# EAGLE board PSU (EAGLE 7.6.0)
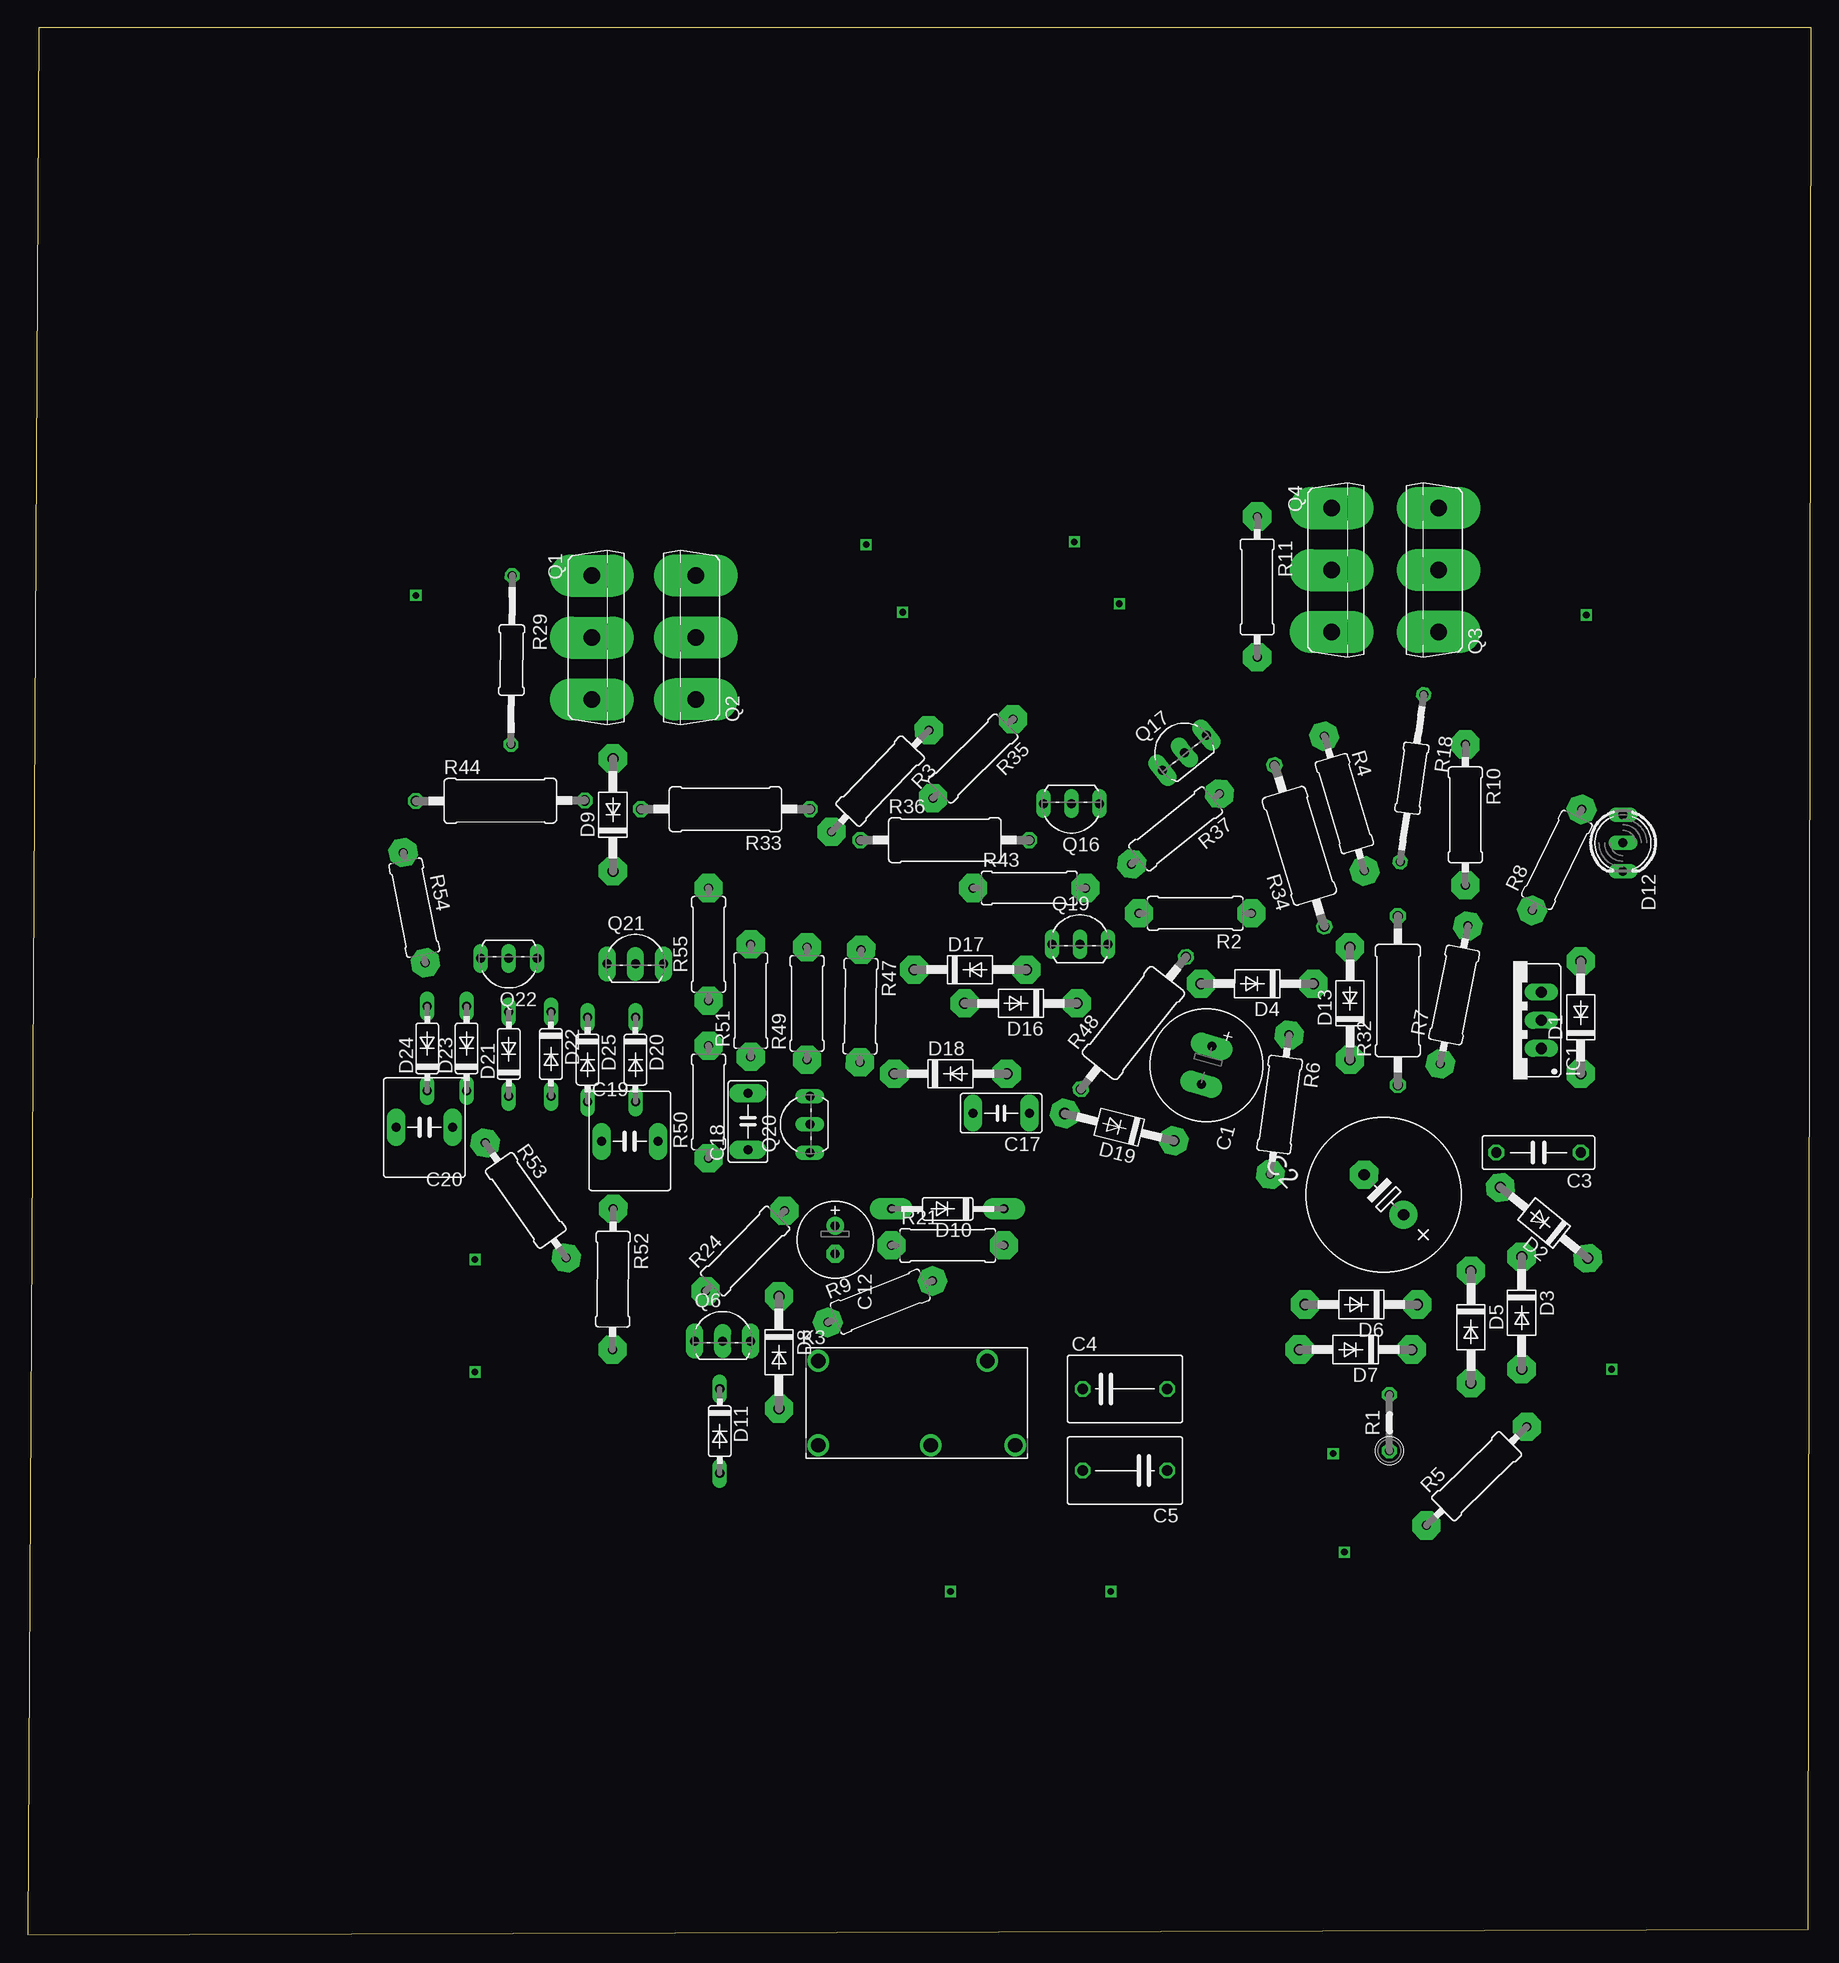
[diagram p0: board, top side]
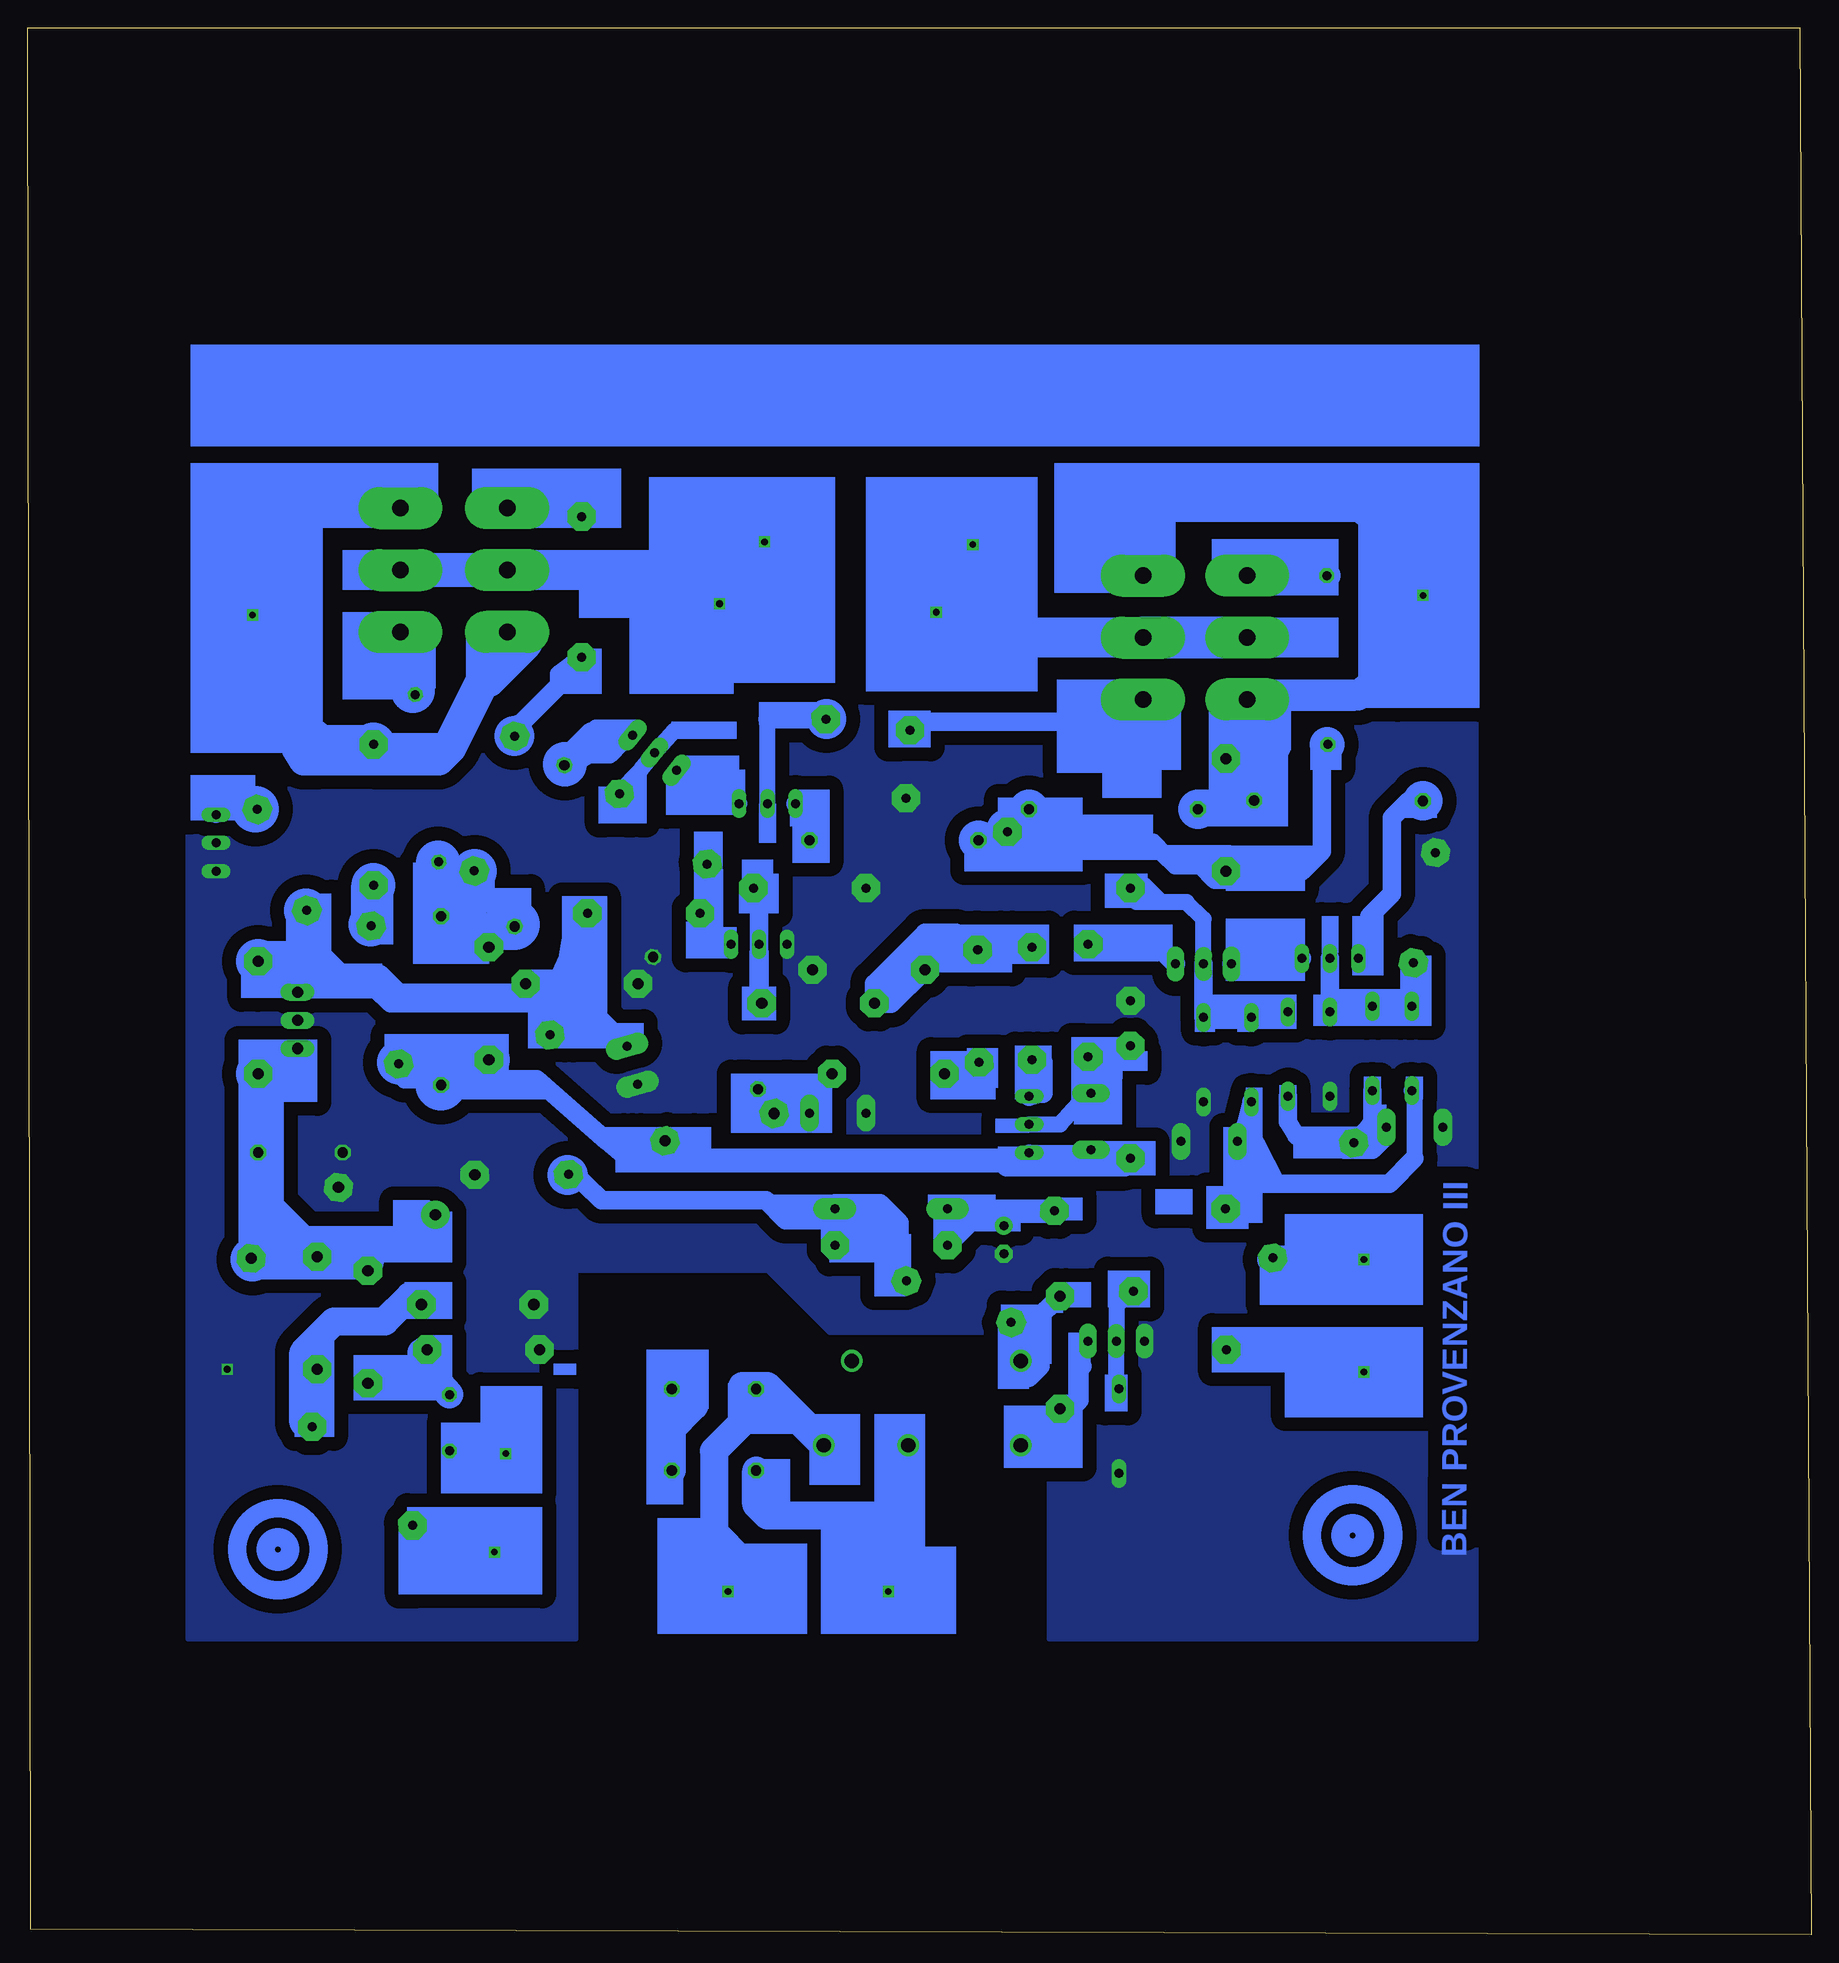
[diagram p1: board, bottom side, seen from below]

Size 161.02 x 172.14 mm. Coordinates in mm from the lower left corner, seen from the top.
Outline: 0,0 160.76,0.51 161.02,172.14 1.02,172.14 0,0
Copper layers (1*16): Top 0.035mm / dielectric 1.5mm / Bottom 0.035mm
Design rules "default": minimum track width 10mil, minimum drill 24mil, track to track 8mil, track to pad 8mil, pad to pad 8mil, via to via 8mil, smd to smd 8mil, copper to edge 40mil, drill to drill 8mil, minimum pad ring 10mil, minimum via ring 8mil, stop-mask expansion 4mil, vias tented up to drill 0mil, thermal gap 10mil

## Footprints (pad centres in the part's own frame; a part is rotated, then mirrored left to right if it is on the bottom)
E3,5-10 = drill 0.813 pad 1.93 long: + -1.778,0; - 1.778,0
E5-13 = drill 1.016 pad 2.54: + -2.54,0 | drill 1.016 pad 2.54 octagon: - 2.54,0
C075-032X103 = drill 0.914 octagon: 1 -3.81,0; 2 3.81,0
C075-063X106 = drill 0.914 octagon: 1 -3.81,0; 2 3.81,0
E2,5-7 = drill 0.813 pad 1.6: + -1.27,0 | drill 0.813 pad 1.6 octagon: - 1.27,0
C050-035X075 = drill 0.813 pad 1.676 long: 1 -2.54,0; 2 2.54,0
C050-075X075 = drill 0.813 pad 1.676 long: 1 -2.54,0; 2 2.54,0
DO41-10 = drill 1 pad 2.54 octagon: A 5.08,0; C -5.08,0
DO35-10 = drill 0.813 pad 1.93 long: A 5.08,0; C -5.08,0
DO35-7 = drill 0.813 long: A 3.81,0; C -3.81,0
DUOLED5MM = drill 0.813 long: AG -2.54,0; AR 2.54,0; K 0,0
78XXS = drill 1.016 long: GND 0,-2.54; IN -2.54,-2.54; OUT 2.54,-2.54
RELAY_ALQ112 = drill 1.3: 1 -8.89,-3.81; 2 -8.89,3.81; 3 1.27,-3.81; 4 6.35,3.81; 5 8.89,-3.81
TO247BV = drill 1.499 pad 3.81 long: D 0,-2.921; G -5.588,-2.921; S 5.588,-2.921
TO92-EBC = drill 0.813 pad 1.524 long: B 0,-1.27 | drill 0.813 pad 1.6 long: C -2.54,-1.27; E 2.54,-1.27
TO92-EBC' = drill 0.813 long: B 0,-1.27; C -2.54,-1.27; E 2.54,-1.27
0207/5V = drill 0.813 octagon: 1 -2.54,0; 2 2.54,0
0309/10 = drill 0.813 pad 2.54 octagon: 1 -5.08,0; 2 5.08,0
0309/12 = drill 0.813 pad 2.54 octagon: 1 -6.35,0; 2 6.35,0
0207/15 = drill 0.813 octagon: 1 -7.62,0; 2 7.62,0
0411/15 = drill 0.914 octagon: 1 -7.62,0; 2 7.62,0

## Placement (x,y rotation side)
C1  100uF  [E3,5-10]  106.43,78.49 254.5 top
C2  560uF  [E5-13]  122.43,66.8 134.5 top
C3  .1uF  [C075-032X103]  136.4,70.61 180 top
C4  10R NTC  [C075-063X106]  99.06,49.28 0 top
C5  10R NTC  [C075-063X106]  99.06,41.91 180 top
C12  22uF  [E2,5-7]  72.9,62.74 270 top
C17  47nF  [C050-035X075]  87.88,74.17 180 top
C18  1uF  [C050-035X075]  65.02,73.41 90 top
C19  10uF  [C050-075X075]  54.36,71.63 0 top
C20  10uF  [C050-075X075]  35.81,72.9 180 top
D1  4007  [DO41-10]  140.21,82.8 90 top
D2  27v  [DO41-10]  136.91,64.26 140.9 top
D3  4007  [DO41-10]  134.87,56.13 270 top
D4  4007  [DO41-10]  111,85.85 179.9 top
D5  4007  [DO41-10]  130.3,54.86 270 top
D6  4007  [DO41-10]  120.4,56.9 180 top
D7  4007  [DO41-10]  119.89,52.83 180 top
D8  4007  [DO41-10]  67.82,52.58 270 top
D9  12v  [DO41-10]  52.83,101.09 90 top
D10  4148  [DO35-10]  83.06,65.53 180 top
D11  15v  [DO35-7]  62.48,45.47 270 top
D12  [DUOLED5MM]  144.02,98.55 270 top
D13  12v  [DO41-10]  119.38,84.07 90 top
D16  4148  [DO41-10]  89.66,84.07 180 top
D17  27v  [DO41-10]  85.09,87.12 0 top
D18  4148  [DO41-10]  83.31,77.72 0 top
D19  68v  [DO41-10]  98.55,72.9 165.9 top
D20  4148  [DO35-7]  54.86,78.99 270 top
D21  4148  [DO35-7]  43.43,79.5 90 top
D22  4148  [DO35-7]  47.24,79.5 270 top
D23  4148  [DO35-7]  39.62,80.01 90 top
D24  4148  [DO35-7]  36.07,80.01 90 top
D25  4148  [DO35-7]  50.55,78.99 270 top
IC1  [78XXS]  134.11,82.55 90 top
K3  ALQ312  [RELAY_ALQ112]  80.26,48.01 0 top
Q1  NMOS V-  [TO247BV]  53.85,117.09 270 top
Q2  NMOS V-  [TO247BV]  57.4,117.09 90 top
Q3  PMOS V+  [TO247BV]  124.46,123.19 90 top
Q4  PMOS V+  [TO247BV]  120.65,123.19 270 top
Q6  ZVN2106  [TO92-EBC]  62.74,54.86 0 top
Q16  MPSA92  [TO92-EBC']  94.23,100.84 180 top
Q17  MPSA42  [TO92-EBC]  103.63,107.7 38.7 top
Q19  BT169D  [TO92-EBC']  95,90.68 0 top
Q20  MPSA92  [TO92-EBC']  69.34,73.15 90 top
Q21  MPSA42  [TO92-EBC]  54.86,88.9 0 top
Q22  MPSA92  [TO92-EBC']  43.43,86.87 180 top
R1  100mA  [0207/5V]  122.94,46.23 90 top
R2  1k74  [0309/10]  105.41,92.2 180 top
R3  22  [0309/12]  76.96,104.14 226.2 top
R4  22  [0309/12]  118.87,102.11 286.7 top
R5  22R  [0309/12]  130.81,41.4 44.5 top
R6  0  [0309/12]  113.03,74.93 262.4 top
R7  0  [0309/12]  128.78,84.84 78.7 top
R8  3k3  [0309/10]  138.05,97.03 63.9 top
R9  0  [0309/10]  76.96,57.15 21.6 top
R10  0  [0309/12]  129.79,101.09 270 top
R11  0  [0309/12]  111,121.67 270 top
R18  22  [0207/15]  124.97,104.39 262 top
R21  100k  [0309/10]  83.06,62.23 0 top
R24  1k  [0309/10]  64.77,61.72 45.4 top
R29  22  [0207/15]  43.69,115.06 269.6 top
R32  33k  [0411/15]  123.7,84.33 90 top
R33  33k  [0411/15]  62.99,101.6 180 top
R34  5k6  [0411/15]  114.81,98.3 107.1 top
R35  2k2  [0309/10]  85.34,106.17 224.6 top
R36  5k6  [0411/15]  82.8,98.81 0 top
R37  2k2  [0309/10]  103.63,99.82 218.7 top
R43  1M  [0309/10]  90.42,94.49 0 top
R44  10k  [0411/15]  42.67,102.36 0.2 top
R47  4k7 2W  [0309/10]  75.18,83.82 269.3 top
R48  1M  [0411/15]  99.82,82.3 51.5 top
R49  4k7 2W  [0309/10]  70.36,84.07 90 top
R50  100k  [0309/10]  61.47,75.18 90 top
R51  25k  [0309/10]  65.28,84.33 90 top
R52  100k HV  [0309/12]  52.83,59.18 269.7 top
R53  100k HV  [0309/12]  44.96,66.29 305.2 top
R54  960k  [0309/10]  34.91,92.71 281.3 top
R55  960k  [0309/10]  61.47,89.41 90 top

## Library data of the parts
C1-C5 C12 C17-C20 R1-R11 R18 R21 R24 R29 R32-R37 R43 R44 R47-R55 = resistor
D1-D11 D13 D16-D25 = diode
D12 = led
IC1 = v-reg
K3 = ALQ112; AVAILABILITY: Unavailable; DESCRIPTION: General Purpose Relay SPDT _1 Form C_ 12VDC Coil Through Hole; MF: Panasonic Electric; MP: ALQ112; PACKAGE: FBGA-484 Panasonic; PRICE: None
Q1-Q4 = transistor-power
Q6 Q17 Q21 = transistor-npn
Q16 Q19 Q20 Q22 = transistor-pnp

## Nets
AGND: C1.- C2.- C3.2 C12.- C17.2 C19.2 C20.2 D2.A D4.A D6.A D7.A D11.A D12.AR D12.K D17.A D20.A D21.C IC1.GND Q6.C Q19.C R35.2 R43.1 R48.2 R54.1 R55.1
N$1: C2.+ C3.1 D1.C D2.C D3.C D5.C IC1.IN
N$2: D3.A D6.C R5.2
N$4: C1.+ D1.A D4.C IC1.OUT R2.1 R6.1 R8.1
N$5: D5.A D7.C R1.2
N$10: C4.1 K3.5
N$11: Q3.G R18.1
N$12: Q1.G R29.1
N$13: R4.1 R11.2
N$14: Q2.G R3.1
N$15: D8.A K3.1 Q6.E
N$16: D10.C R6.2 R9.2 R21.2
N$17: R1.1
N$18: R5.1
N$19: C5.2 K3.3
N$20: D8.C K3.2 R9.1
N$22: R7.2 R10.2
N$24: D12.AG R8.2
N$30: D9.C R3.2 R29.2 R33.1 R36.1
N$36: Q4.G R11.1
N$37: Q3.S Q4.S R10.1
N$39: C4.2 C5.1
N$40: C12.+ D10.A R21.1 R24.2
N$43: D11.C Q6.B R24.1
N$54: Q3.D Q4.D
N$55: D9.A Q1.S Q2.S R33.2 R44.2
N$57: Q1.D Q2.D
N$65: D13.A R4.2 R18.2 R32.2 R34.1
N$70: Q17.E R34.2
N$71: Q16.E R36.2
N$72: Q16.C Q17.C
N$73: Q16.B R35.1
N$74: Q17.B R37.1
N$75: Q19.E R2.2 R37.2
N$79: D16.C Q19.B R43.2
N$88: C18.1 D13.C D19.C Q20.C R7.1 R32.1 R50.1
N$89: Q22.E R44.1
N$90: Q20.E R49.1
N$91: D16.A D17.C R47.1 R49.2
N$92: D18.C R47.2
N$93: C17.1 D18.A D19.A R48.1
N$94: C18.2 Q20.B R50.2 R51.1
N$95: Q21.E R51.2
N$96: Q21.C Q22.C
N$98: D21.A D23.A D24.A Q22.B R54.2
N$99: D20.C D22.C D25.C Q21.B R55.2
N$100: C20.1 D22.A D23.C R53.1
N$101: C19.1 D24.C D25.A R52.1
N$103: R52.2
N$106: R53.2

## Tracks (layer width: path | path; a pad name or v marks a point on that pad's centre or on a via)
AGND  (via drill 0.6)
  other vias: 143,51.05
  pour Bottom (isolate 1.27, no thermals): 30.23,138.68 146.56,138.68 146.56,26.67 111.51,26.67 111.51,59.94 94.23,59.94 88.65,54.36 68.83,54.36 68.83,26.67 30.23,26.67
N$1
  Bottom 0.813: IC1.IN 138.94,77.72
  Bottom 1.676: 138.94,77.72 D1.C 139.7,77.22 C3.1 139.7,68.58 | D2.C 139.7,64.57
  Bottom 2.54: 139.7,68.58 139.7,68.14 139.7,66.29 | 139.7,66.29 139.7,64.57 | 139.7,66.29 136.14,62.74 135.13,62.74 | 135.13,62.74 129.54,62.74 | 129.54,62.74 127,62.74 124.75,64.99 C2.+ | D5.C 129.54,62.74 | D3.C 135.13,61.47 135.13,62.74
N$2
  Bottom 2.54: R5.2 136.14,46.23 136.14,51.31 | 136.14,51.31 136.14,52.58 133.35,55.37 128.78,55.37 126.49,57.66 D6.C | D3.A 135.13,51.31 136.14,51.31
N$3  (via drill 0.6)
  other vias: 40.39,50.8
N$4
  Bottom 0.813: IC1.OUT 136.65,85.85
  Bottom 1.676: 112.82,84.67 112.01,89.66 R2.1 113.28,85.94 D4.C 115.83,85.85 114.55,85.85 112.78,84.84 113.54,84.07 127,84.07 | 112.82,84.67 R6.1 | C1.+ 111.37,84.67 112.82,84.67 | 127,84.07 128.27,84.07 129.54,85.34 135.89,85.34 | 129.29,86.61 132.59,86.61 | 132.59,86.61 136.65,86.61 | 136.65,86.61 137.16,86.61 D1.A | 136.65,85.85 136.65,86.61 | 127,84.58 127,84.07 | R8.1 136.65,89.92 136.65,86.61 | 132.59,86.61 135.13,89.15
  Bottom 1.93: 129.29,86.61 127.25,84.58 127,84.58
N$5
  Bottom 2.54: R1.2 125.22,51.31 125.48,51.31 | 125.48,51.31 127.76,50.8 128.02,50.55 D5.A | D7.C 125.48,52.58 125.48,51.31
N$6
  Bottom 2.54: 48.77,60.96 45.47,60.96 45.21,60.71
N$9  (via drill 0.6)
  other vias: 40.39,60.96
N$10
  Bottom 2.54: K3.5 94.23,49.28 C4.1
N$11
  Bottom 1.676: Q3.G 125.96,115.67 R18.1
N$12
  Bottom 2.54: R29.1 44.25,122.68 Q1.G
N$13
  Bottom 1.676: 116.79,109.27 116.92,108.73 | 116.92,108.73 R4.1 | R11.2 113.03,113.79 113.03,112.78 116.92,108.89 116.92,108.73
N$14
  Bottom 1.676: R3.1 80.61,109.47 64.52,109.47 63.77,108.72 63.11,108.72
  Bottom 3.81: Q2.G 63.11,108.72
N$15
  Bottom 1.422: Q6.E 65.79,53.09 65.79,51.31
  Bottom 1.676: 65.79,51.31 66.04,51.05 66.04,48.26 68.45,45.85 | 68.45,45.85 69.85,44.45 K3.1 | D8.A 68.2,45.85 68.45,45.85
N$16
  Bottom 1.676: 112.27,67.82 112.27,68.07 111.51,68.83 112.78,68.58 111.51,68.33 110.74,67.82 | R9.2 83.06,60.39 82.3,61.98 | 82.3,61.98 82.3,64.26 84.07,66.04 88.14,66.04 D10.C 88.14,64.77 88.39,64.52 92.58,64.52 94.35,66.29 109.22,66.29 110.74,67.82 | R21.2 87.88,61.98 82.3,61.98 | R6.2 112.13,68.58 111.51,68.58 110.74,67.82
N$19
  Bottom 2.54: K3.3 81.53,39.62 83.31,37.85 94.23,37.85 95.25,38.86 C5.2
N$20
  Bottom 1.676: K3.2 70.1,52.83 | 70.1,52.83 70.1,55.37 | 70.1,55.37 D8.C | 70.1,55.37 70.2,55.28 R9.1 | 70.1,52.83 69.6,52.32 69.6,51.31 70.61,50.29 72.39,50.29
N$21
  Bottom 1.676: 104.65,70.36 107.19,70.36 108.97,71.88
N$22
  Bottom 1.676: R7.2 130.02,94.51 R10.2
N$24
  Bottom 1.422: D12.AG 141.99,101.85 R8.2
N$25
  Bottom 2.54: 48.51,110.24 48.26,110.24 48.26,107.19 49.28,106.17 52.07,106.17
N$28  (via drill 0.6)
  other vias: 75.69,125.48
N$29  (via drill 0.6)
  other vias: 78.99,119.38
N$30
  Bottom 1.422: 69.09,100.58 R33.1 | 71.12,99.82 71.25,99.69 71.39,99.56 R3.2
  Bottom 1.676: 51.05,95.25 53.85,95.25 55.12,96.52 57.4,96.52 58.42,97.54 | 71.12,99.82 R33.1 | 58.42,97.54 52.58,97.54 D9.C 45.97,96.01 44.2,97.79 44.2,106.12 R29.2 | 58.42,97.54 59.44,98.55 69.85,98.55 70.99,99.69 71.25,99.69
  Bottom 2.54: R3.2 73.32,98.81 R36.1
N$32  (via drill 0.6)
  other vias: 94.49,125.73
N$33  (via drill 0.6)
  other vias: 98.55,120.14
N$34  (via drill 0.6)
  other vias: 117.86,43.43
N$35  (via drill 0.6)
  other vias: 118.87,34.54
N$36
  Bottom 1.676: R11.1 112.78,128.78 Q4.G 118.36,128.78
N$37
  Bottom 2.54: 126.62,129.03 134.87,129.03 135.64,128.02 135.64,108.97 134.37,107.95 129.79,107.95 R10.1
  Bottom 3.048: 116.08,117.35 116.08,116.59 119.38,113.28 119.89,113.28 | Q4.S 119.89,113.28 | 119.89,113.28 122.94,107.19 123.95,106.17 129.54,106.17 129.79,106.43 R10.1 | Q3.S 126.62,129.03 130.81,129.03 | 119.89,113.28 119.89,117.35
N$38
  Bottom 2.54: 134.87,105.92 136.14,105.92 136.91,107.19 136.91,129.29 135.13,131.06
N$39
  Bottom 2.54: C4.2 C5.1
N$40
  Bottom 0.813: C12.+ 72.9,65.53
  Bottom 1.676: R24.2 68.78,65.53 72.9,65.53 74.68,65.53 | 74.68,65.53 D10.A | R21.1 74.68,65.53
N$41
  Bottom 2.54: 92.96,47.5 95.25,47.5 99.06,43.69 99.06,36.32 96.52,33.78 96.52,28.7
N$42
  Bottom 2.54: 83.06,37.34 84.84,35.56 84.84,28.7
N$43
  Bottom 1.422: R24.1 62.74,56.82 Q6.B 62.74,49.53 D11.C
N$44
  Bottom 2.54: 100.84,50.29 100.84,47.75 103.12,45.47 103.12,44.96
N$45  (via drill 0.6)
  other vias: 83.31,30.99
N$46  (via drill 0.6)
  other vias: 97.79,30.99
N$47
  Bottom 2.54: 89.41,44.7 94.23,49.53 96.52,49.53 96.52,46.74 96.01,47.24 93.73,47.24
N$50  (via drill 0.6)
  other vias: 140.72,119.13
N$51  (via drill 0.6)
  other vias: 35.05,120.9
N$54
  Bottom 3.048: Q4.D Q3.D
N$55
  Bottom 1.676: R44.2 49.3,101.6 51.05,101.6 | 51.05,101.6 R33.2 | D9.A 51.31,105.92 | 51.31,105.92 51.31,102.11 51.05,101.85 51.05,101.6 | Q1.S 51.31,111.12 51.31,105.92
  Bottom 2.54: 40.89,111.76 41.15,111.76 | 50.67,111.76 51.31,111.76 | Q1.S 50.67,111.76 | 50.67,111.76 41.15,111.76 | 41.15,111.76 39.62,113.03 39.62,127.76 40.64,128.78 57.91,128.78 60.33,126.36 Q2.S
N$57
  Bottom 3.81: Q1.D Q2.D
N$65
  Bottom 1.676: R34.1 118.24,92.2 R18.2 | R18.2 122.2,94.23 R4.2 | D13.A 121.41,91.19 | 121.41,91.19 R32.2 | R18.2 121.18,91.19 121.41,91.19
N$70
  Bottom 1.422: 106.5,108.2 Q17.E 106.17,108.53 106.17,108.97 109.22,108.97 | 112.57,106.17 112.57,106.38 110.24,108.71 | 112.57,106.17 R34.2 | 110.24,108.71 107.44,107.44 108.46,106.43 110.49,106.43 110.74,106.17 112.57,106.17 | 110.24,108.71 109.22,108.97 | 109.22,108.97 109.73,108.97 109.22,108.46 106.68,108.46
N$71
  Bottom 1.676: Q16.E 90.42,100.84 R36.2 90.17,98.04
N$72
  Bottom 1.422: Q16.C 99.78,105.12 Q17.C
N$73
  Bottom 1.422: Q16.B 94.23,109.73
  Bottom 1.676: 94.23,109.73 90.16,109.74 R35.1
N$74
  Bottom 1.422: R37.1 107.6,103.22 105.66,105.16 Q17.B 102.62,108.71 98.04,108.71
N$75
  Bottom 0.254: Q19.E 98.04,89.92 99.31,89.92
  Bottom 1.676: 99.06,96.01 99.06,95.76 | 99.06,95.76 99.06,90.68 | 99.06,90.68 99.06,89.92 | 99.06,89.92 98.81,89.66 | R37.2 99.57,95.76 99.06,95.76 | 99.31,89.92 99.06,89.92 | R2.2 99.82,90.68 99.06,90.68
N$79
  Bottom 1.676: 95,88.14 95,88.65 Q19.B 95,92.71 95.5,93.22 R43.2
  Bottom 1.778: D16.C 94.74,83.57 95,83.57 95,88.65
N$88
  Bottom 1.422: 61.72,70.61 65.02,70.61 | 65.02,70.61 C18.1 | Q20.C 65.02,70.61
  Bottom 1.676: R50.1 61.72,70.61 | 103.12,70.1 104.14,71.12 | D19.C 104.02,71.12 104.14,71.12 | 104.14,71.12 104.65,71.63 108.71,71.63 115.06,77.22 119.38,77.22 | 119.38,77.22 123.7,77.22 | 123.7,77.22 127,77.22 R7.1 | D13.C 119.38,77.22 | R32.1 123.7,77.22
  Bottom 1.778: 103.12,70.1 73.41,70.1 72.64,69.34 61.98,69.34 R50.1
N$89
  Bottom 0.61: 39.88,88.14 Q22.E
  Bottom 1.676: R44.1 35.08,102.36 36.32,102.36 37.85,100.84 37.85,93.98 39.88,91.95 39.88,88.14
N$90
  Bottom 1.778: Q20.E 69.6,75.95 69.34,75.95 69.34,78.74 R49.1
N$91
  Bottom 0.254: 74.67,88.91 74.43,89.15 R49.2 70.61,88.9 R47.1
  Bottom 1.422: 76.67,89.92 77.18,90.42 77.22,90.42
  Bottom 1.778: D17.C 83.06,84.07 D16.A 84.58,85.85 80.01,90.42 77.22,90.42 | 76.67,89.92 74.67,88.91 69.84,88.91 R49.2
N$92
  Bottom 1.778: R47.2 74.91,77.72 D18.C
N$93
  Bottom 1.676: 95.5,73.91 94.82,74.59 R48.1
  Bottom 1.778: D18.A 89.41,76.71 93.22,76.71 | 93.22,76.71 95,76.71 | C17.1 93.22,76.71 | R48.1 95,76.71 | 95,76.71 96.14,75.06
  Bottom 2.54: D19.A 94.82,74.14 94.82,74.59
N$94
  Bottom 1.422: 63.63,76.83 63.63,75.95 C18.2 65.28,75.95 67.82,73.15 Q20.B
  Bottom 1.676: 63.63,76.83 62.99,77.47 62.99,79.5 | 62.99,79.5 62.23,80.26 R50.2 | R51.1 64.52,79.5 62.99,79.5
N$95
  Bottom 1.778: Q21.E 59.18,89.41 R51.2
N$96
  Bottom 1.676: Q22.C 46.48,87.63 Q21.C
N$98
  Bottom 0.406: D23.A 39.12,83.82 39.12,83.57
  Bottom 1.27: R54.2 35.9,84.49 37.08,83.31 D21.A 42.93,83.82 D23.A
  Bottom 1.676: D24.A 38.86,83.57 39.12,83.57 | Q22.B D21.A
N$99
  Bottom 1.422: D22.C 50.04,83.31 | Q21.B 54.86,91.69 56.39,93.22 58.67,93.22 | 58.67,93.22 60.96,93.22 61.47,93.73 R55.2 | 58.67,93.22 60.2,94.74 61.47,94.74
  Bottom 1.676: Q21.B D20.C D25.C 50.04,83.31
N$100
  Bottom 1.676: D23.C 39.62,73.41 39.9,73 | 39.9,73 40.64,72.14 42.67,72.14 | 42.67,72.14 46.48,72.14 47.24,73.41 D22.A | 42.67,72.14 R53.1 42.16,71.19 42.16,70.87 39.62,70.87 38.35,72.14 C20.1 | 39.55,72.9 39.9,73
N$101
  Bottom 1.422: D24.C 35.81,76.2 35.81,70.1
  Bottom 1.676: 51.05,73.15 48.26,67.82 38.1,67.82 35.81,70.1 | 51.05,73.15 D25.A | 51.05,73.15 51.05,71.88 51.56,70.87 51.56,68.83 50.8,67.82 48.51,67.82 50.56,69.86 | 50.56,69.86 R52.1 | C19.1 50.8,70.61 50.8,70.1 50.56,69.86
(copper drawn outside any net)
  shapes: Bottom area x394, Bottom circle x34

## Text on the board
Bottom: BEN PROVENZANO III